# Altium PCB bop_it_pcb.PcbDoc
Units mil, origin at the board's own origin, x right, y up, seen from the top; angles counter-clockwise.
Board outline 3260 x 1550 mil, 2 copper layers (Top Layer, Bottom Layer); 18 components, 23 nets, 93 pads, 0 vias.
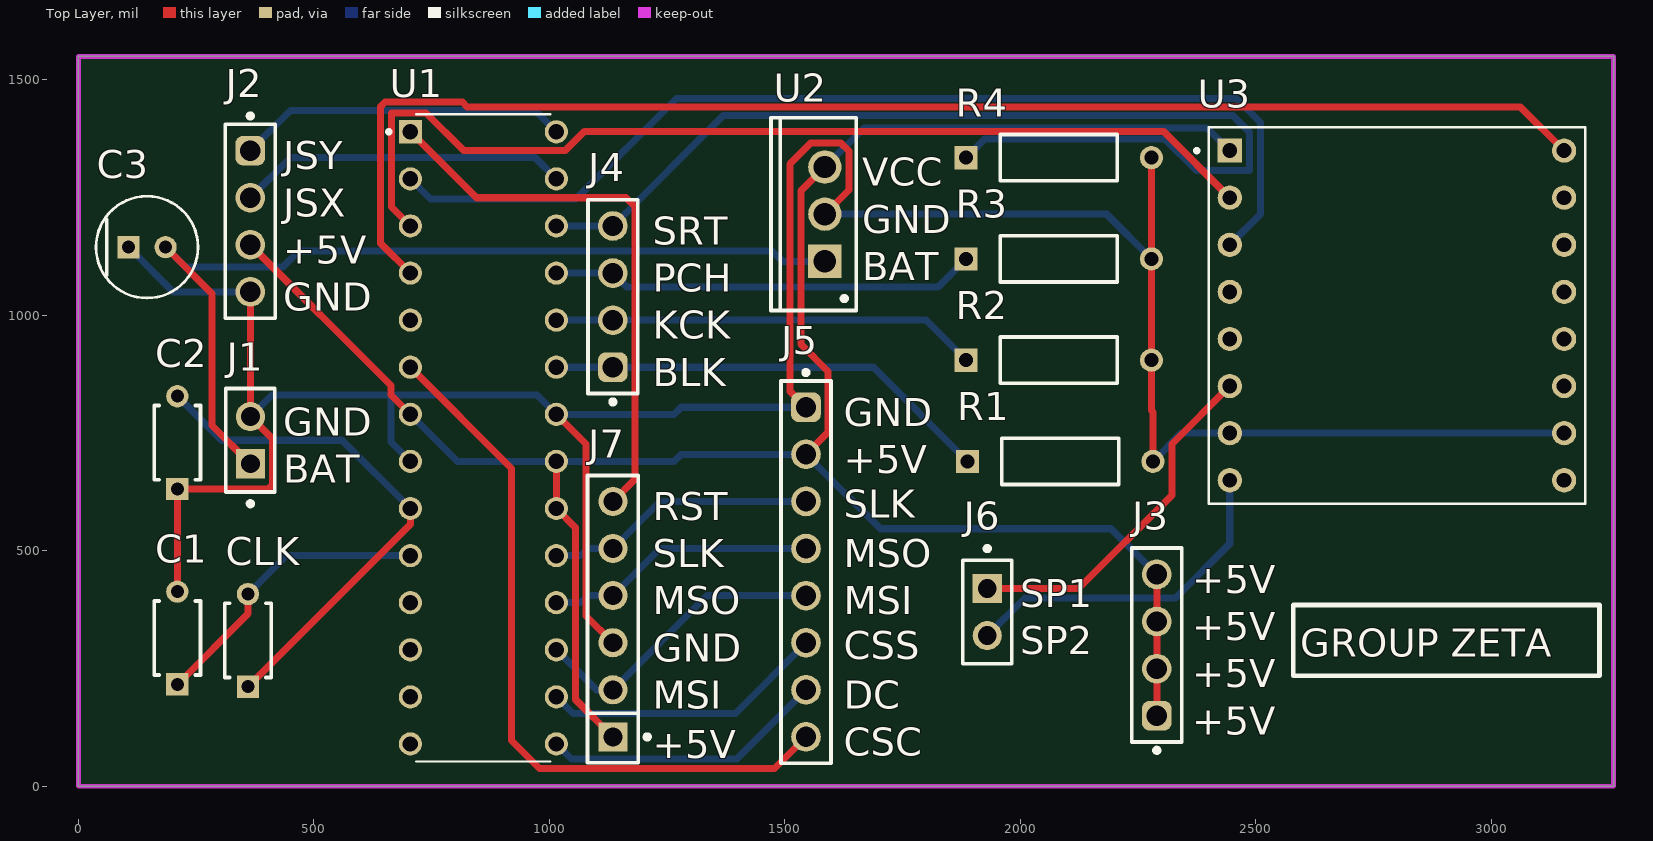
[diagram p0: Top Layer view]
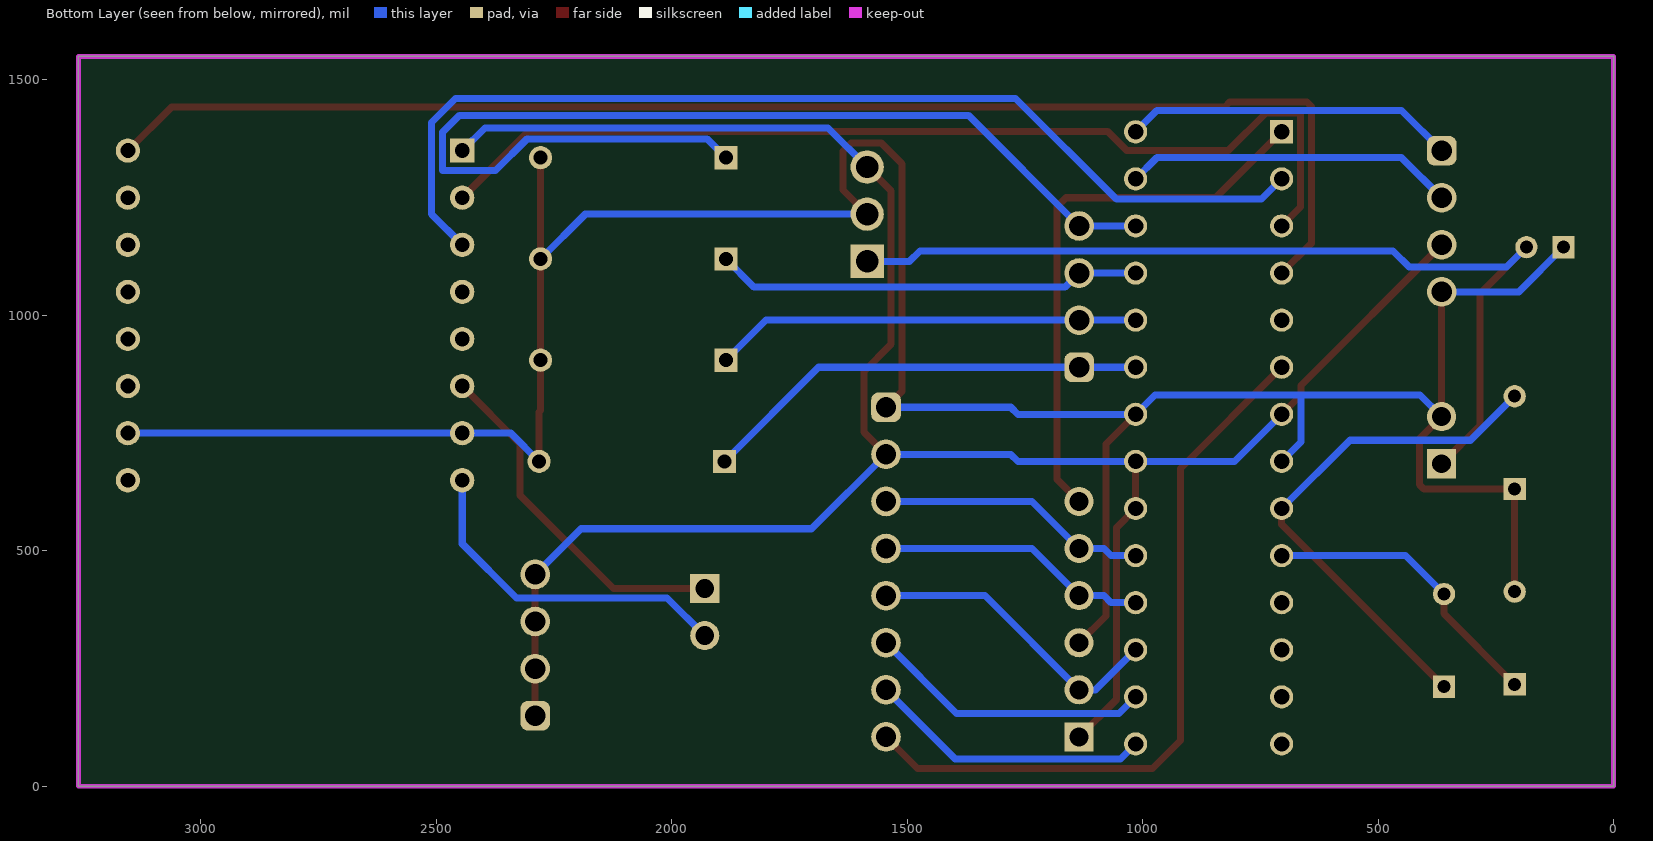
[diagram p1: Bottom Layer view, seen from below]
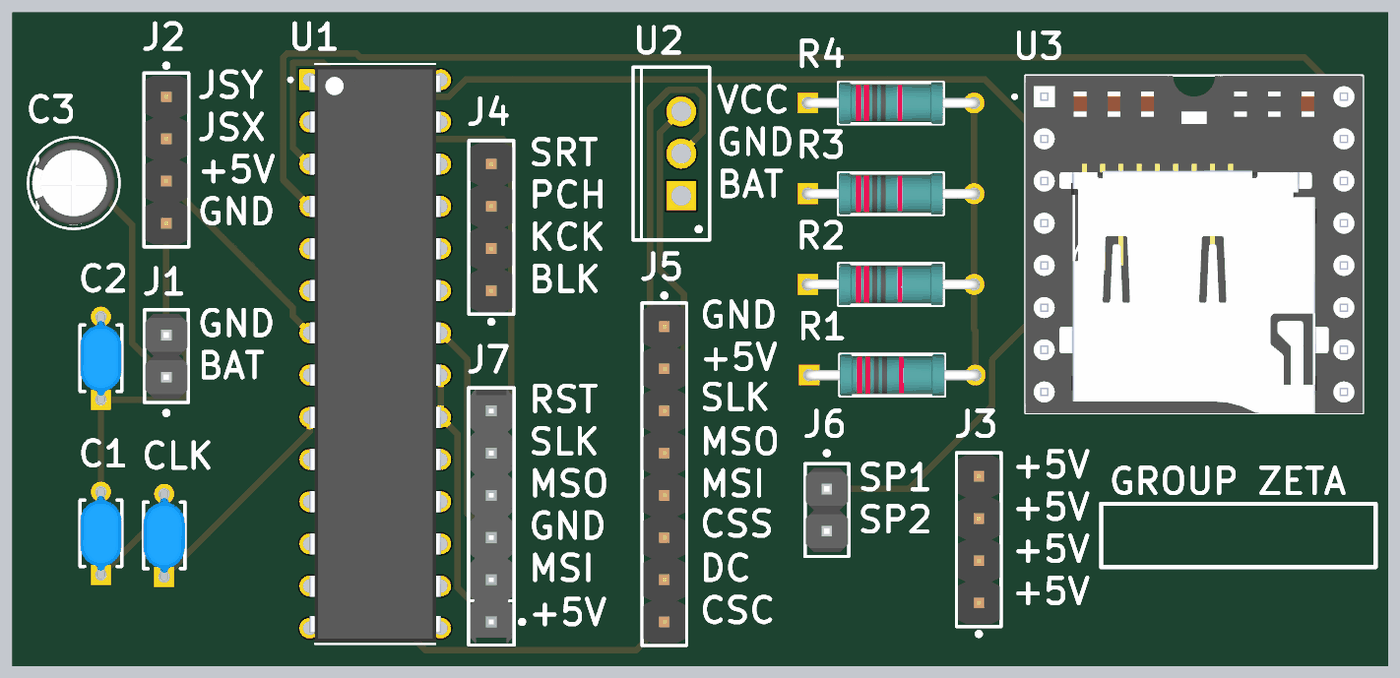
[diagram p2: 3D render of the assembled board from above, using the file's embedded part models]

## Layer stack, top to bottom
Top Solder: solder mask 0.4, Solder Resist, Dk 3.5
Top Layer: signal copper 1.4
Dielectric 1: dielectric 12.6, FR-4, Dk 4.8
Bottom Layer: signal copper 1.4
Bottom Solder: solder mask 0.4, Solder Resist, Dk 3.5

## Board outline
0,0 3260,0 3260,1550 0,1550

## Design rules (kind name [scope] priority, off if disabled: settings)
BoardOutlineClearance [All] p1: gap=7.87 ignorepadtopadclearanceinfootprint=FALSE except(15.75: Arc-SplitBarrior Arc-SplitContinuation Track-SplitBarrior Track-SplitContinuation SMDPad-SplitBarrior SMDPad-SplitContinuation THPad-SplitBarrior THPad-SplitContinuation Via-SplitBarrior Via-SplitContinuation Fill-SplitBarrior Fill-SplitContinuation Poly-SplitBarrior Poly-SplitContinuation Region-SplitBarrior Region-SplitContinuation Text-SplitBarrior Text-SplitContinuation)
Clearance "Clearance Bottom Layer" [OnLayer('Bottom Layer')] p1: gap=8 ignorepadtopadclearanceinfootprint=TRUE except(10: Arc-Text Track-Text SMDPad-Text THPad-Text Via-Text Fill-Text Poly-Text Region-Text Text-Text)
Clearance "Clearance Top Layer" [OnLayer('Top Layer')] p2: gap=8 ignorepadtopadclearanceinfootprint=TRUE except(10: Arc-Text Track-Text SMDPad-Text THPad-Text Via-Text Fill-Text Poly-Text Region-Text Text-Text)
Clearance [All] p3: gap=7.87 ignorepadtopadclearanceinfootprint=FALSE except(3.5: Arc-Arc Arc-Track Arc-SMDPad Track-Track Track-SMDPad SMDPad-SMDPad; 5: Arc-Via Track-Via SMDPad-Via THPad-Via Via-Via; 10: Arc-Text Track-Text SMDPad-Text THPad-Text Via-Text Fill-Text Poly-Text Region-Text Text-Text)
HoleSize [All] p1: absolutevalues=TRUE maxlimit=248.03 minlimit=7.87 maxpercent=80.000 minpercent=20.000
MinimumAnnularRing [All] p1: minimumring=3
MinimumSolderMaskSliver [All] p1: minsoldermaskwidth=3.94
PolygonConnect PolygonConnect_1 [All] p1: thpad.connectstyle=Relief thpad.reliefconductorwidth=20 thpad.reliefentries=4 thpad.polygonreliefangle="90 Angle" thpad.airgapwidth=10 smdpad.connectstyle=Relief smdpad.reliefconductorwidth=20 smdpad.reliefentries=4 smdpad.polygonreliefangle="90 Angle" smdpad.airgapwidth=10 via.connectstyle=Direct via.reliefconductorwidth=20 via.reliefentries=4 via.polygonreliefangle="90 Angle" via.airgapwidth=10
RoutingCorners [All] p1: cornerstyle=Round minsetback=100 maxsetback=100
RoutingVias [All] p1: holewidth=19.68 width=39.37 viastyle="Through Hole" minholewidth=7.87 minwidth=17.72 maxholewidth=39.37 maxwidth=78.74
SilkToSilkClearance [All] p1: silktosilkclearance=3.94
SilkToSolderMaskClearance [IsPad] p1: minsilkscreentomaskgap=3.94 clearancetoexposedcopper=TRUE
SolderMaskExpansion [All] p1: expansion=4 istentingtop=FALSE
SupplyNets "Schematic Supply Nets" [InNet('GND')] p1: voltage=0.000
Width [All] p1: maxlimit=100 minlimit=3.5 preferedwidth=15
25 further rules are at their usual default settings.

## Components (designator, comment, footprint, x,y, rotation, side; value= is the part's Value field where it differs from the comment)
C1 "22pF" FP-RDE0M1-MFG 210,315 r90 top
C2 "22pF" FP-RDE0M1-MFG 210,730 r90 top
C3 "" FP-RAD-TH-D_5_0_5-L_11_1-MFG 145.63,1145 r0 top
CLK "" FP-RDE0M1-MFG 360,310 r90 top
J1 "Power Supply" FP-M20-9990246-MFG 365,735 r90 top
J2 "Joystick" 61300411121 365,1200 r270 top
J3 "Buttons In" 61300411121 2290,300 r90 top
J4 "Buttons Out" 61300411121 1135,1040 r90 top
J5 "Display" 61300811121 1545,455 r270 top
J6 "Speaker" FP-M20-9990246-MFG 1930,370 r270 top
J7 "Programmer" FP-22-28-4060-MFG 1135,355 r90 top
R1 "10k" FP-MBB0207-MFG 2085,690 r0 top
R2 "10k" FP-MBB0207-MFG 2081.85,905 r0 top
R3 "10k" FP-MBB0207-MFG 2081.85,1120 r0 top
R4 "10k" FP-MBB0207-MFG 2081.85,1335 r0 top
U1 "ATMEGA328-PU" DIP787W46P254L3467H508Q28 860,740 r0 top
U2 "L7805CV" TO220FP 1585,1215 r90 top
U3 "DFPlayer" MODULE_DFR0299 2800,1000 r0 top

## Footprints (in the part's own frame and the unit in brackets; to place one, negate y for a bottom-side part, rotate by r counter-clockwise, add the part's x,y. Pads: shape width x height; smd on the part's side, far side on the other; paste and mask are expansions set on the pad)
61300411121 [mm] "Pin Header, pitch 2.54 mm, THT, Vertical, single row, 4p"
  rrect50% 1.6x1.6 hole 1.1: 1(-3.81,0)
  round 1.6 hole 1.1: 2(-1.27,0) 3(1.27,0) 4(3.81,0)
  silkscreen extent -5.8,-1.34 5.23,1.34, body extent -5.08,-1.27 5.08,1.27, height 8.57
61300811121 [mm] "Pin Header, pitch 2.54 mm, THT, Vertical, single row, 8p"
  rrect50% 1.6x1.6 hole 1.1: 1(-8.89,0)
  round 1.6 hole 1.1: 2(-6.35,0) 3(-3.81,0) 4(-1.27,0) 5(1.27,0) 6(3.81,0) 7(6.35,0) 8(8.89,0)
  silkscreen extent -10.88,-1.34 10.31,1.34, body extent -10.16,-1.27 10.16,1.27, height 8.57
DIP787W46P254L3467H508Q28 [mm]
  rect 1.25x1.25 / inner round 1.25 / far side rect 1.25x1.25 hole 0.83: 1(-3.937,16.51)
  round 1.25 hole 0.83: 2(-3.937,13.97) 3(-3.937,11.43) 4(-3.937,8.89) 5(-3.937,6.35) 6(-3.937,3.81) 7(-3.937,1.27) 8(-3.937,-1.27) 9(-3.937,-3.81) 10(-3.937,-6.35) 11(-3.937,-8.89) 12(-3.937,-11.43) 13(-3.937,-13.97) 14(-3.937,-16.51) 15(3.937,-16.51) 16(3.937,-13.97) 17(3.937,-11.43) 18(3.937,-8.89) 19(3.937,-6.35) 20(3.937,-3.81) 21(3.937,-1.27) 22(3.937,1.27) 23(3.937,3.81) 24(3.937,6.35) 25(3.937,8.89) 26(3.937,11.43) 27(3.937,13.97) 28(3.937,16.51)
  silkscreen extent -5.2,-17.45 3.62,17.45, body extent -3.95,-17.34 3.95,17.34, height 4.57
FP-22-28-4060-MFG [mm]
  rect 1.57x1.57 hole 1.02 paste-2539.97 mask+0: 1(-6.35,0)
  round 1.57 hole 1.02 paste-2539.97 mask+0: 2(-3.81,0) 3(-1.27,0) 4(1.27,0) 5(3.81,0) 6(6.35,0)
  silkscreen extent -7.75,-1.97 7.75,1.37, body extent -7.85,-1.47 7.85,1.47, height 0.25
FP-M20-9990246-MFG [mm]
  rect 1.57x1.57 hole 1.02 paste-2539.97 mask+0: 1(-1.27,0)
  round 1.57 hole 1.02 paste-2539.97 mask+0: 2(1.27,0)
  silkscreen extent -3.55,-1.32 2.79,1.32, body extent -2.89,-1.42 2.89,1.42, height 0.25
FP-MBB0207-MFG [mm]
  rect 1.25x1.25 hole 0.75 paste-2539.97 mask+0: 1(-5,0)
  round 1.25 hole 0.75 paste-2539.97 mask+0: 2(5,0)
  silkscreen extent -3.15,-1.25 3.15,1.25, body extent -5.72,-1.35 5.72,1.35, height 0.25
FP-RAD-TH-D_5_0_5-L_11_1-MFG [mm]
  rect 1.2x1.2 hole 0.7 paste-2539.97 mask+0: 1(-1,0)
  round 1.2 hole 0.7 paste-2539.97 mask+0: 2(1,0)
  silkscreen extent -2.75,-2.75 2.75,2.75, body extent -2.85,-2.85 2.85,2.85, height 0.25
FP-RDE0M1-MFG [mm]
  rect 1.2x1.2 hole 0.7 paste-2539.97 mask+0: 1(-2.5,0)
  round 1.2 hole 0.7 paste-2539.97 mask+0: 2(2.5,0)
  silkscreen extent -2,-1.25 2,1.25, body extent -3.2,-1.35 3.2,1.35, height 0.25
MODULE_DFR0299 [mil]
  rect 51.5x51.5 / inner round 51.5 / far side rect 51.5x51.5 hole 31.5: 1(-355,350)
  round 51.5 hole 31.5: 2(-355,250) 3(-355,150) 4(-355,50) 5(-355,-50) 6(-355,-150) 7(-355,-250) 8(-355,-350) 9(355,-350) 10(355,-250) 11(355,-150) 12(355,-50) 13(355,50) 14(355,150) 15(355,250) 16(355,350)
  silkscreen extent -429,-400 400,400, body extent -400,-400 400,400, height 246
TO220FP [mm] "TO, Thru-Hole, Vertical, Heatsink Mounted; 3 In-Line Leads; Pitch 2.54 mm"
  rect 1.8x1.8 hole 1.2: 1(-2.54,0)
  round 1.8 hole 1.2: 2(0,0) 3(2.54,0)
  silkscreen extent -5.2,-1.7 5.2,2.9, body extent -5.25,-1.75 5.25,2.95, height 20

## Part data
C1 C2 CLK: library part CMP-06035-043024-1, "Ceramic Capacitor 10nF ±10% 50V X7R Radial", Capacitance=10nF, Case/Package=Radial, Dielectric=X7R, Max Operating Temperature=125°C, Min Operating Temperature=-55°C, Package Quantity=500, Resistor Type=Ceramic, Tolerance=10%, Voltage Rating=50V, Height=3.5mm, Height - Seated (Max)=0.236inch, Lead Diameter=0.5mm, Lead Free="Lead Free", Lead Pitch=0.197inch, Lead/Base Style=Kinked, Length=0.157inch, Mount="Through Hole", Packaging=Bulk, Termination=Radial, Voltage Rating (DC)=50V, Width=0.098inch
C3: library part CMP-05427-001266-1, "Aluminum Electrolytic Capacitors (Radial Lead Type) 1uF ±20% 50V", Capacitance=1uF, Case/Package=Radial, Max Operating Temperature=105°C, Min Operating Temperature=-40°C, Package Quantity=2000, Ripple Current=8mA, Tolerance=20%, Voltage Rating=50V, Diameter=5mm, Height=11mm, Height - Seated (Max)=0.472inch, Lead Diameter=0.5mm, Lead Pitch=5mm, Length=11mm, Life (Hours)=5000Hour, Mount="Through Hole", Packaging="Tape and Reel", Radiation Hardening=No, RoHS Compliant=Yes, Series=EB, Termination=Radial, Voltage Rating (DC)=50V
J1 J6: library part CMP-15831-000009-1, "CONN HEADER VERT 2POS 2.54MM", Current Rating=3A, Manufacturer=Harwin, Manufacturer Part Number=M20-9990246, Temperature="-40°C to +105°C", Temperature Range High=+105°C, Temperature Range Low=-40°C, Automotive=No, Category=Conn, ComponentLink2Description=Datasheet, ComponentLink2URL=https://cdn.harwin.com/pdfs/M20-999.pdf, Conn Gender=Male, Conn Orientation=Vertical, Contact Material=Tin,Nickel, Device Class L1=Connectors, Device Class L2="Headers and Wire Housings", Device Class L3=unset, Digikey Description="CONN HEADER VERT 2POS 2.54MM", Height=8.99mm, Lead Free=Yes, Mouser Description="2.54mm (0.1\") Pitch SIL Vertical PC Tail Pin Header, 6.1mm mating pin height, tin, 2 contacts", Number Of Contacts=2, Number Of Rows=1, Octopart=https://octopart.com/m20-9990246-harwin-2590635, Package=M20-9990246, Pitch=2.54mm, RoHS=TRUE
J2 J3 J4: library part CMP-1502-01064-3, Color=Black, Contact Resistance=20mΩ, Current Rating=3A, Max Operating Temperature=105°C, Min Operating Temperature=-40°C, Operating Supply Voltage=250V, Connector Type="Male Pin", Contact Material=Copper, Contact Mating Length=5.9944mm, Contact Plating=Gold, Gender=Male, Height=8.89mm, Lead Free="Lead Free", Lead Pitch=2.54mm, Mount="Through Hole", NexarPartId=32855522, Number Of Contacts=4, Number of Pins=4, Number of Positions=4, Number Of Rows=1, Orientation=Vertical, Packaging=Bulk, Pitch=2.54mm, REACH SVHC=Unknown, RoHS=Compliant, Termination=Solder, Voltage Rating=250V
J5: library part CMP-1502-01076-3, Color=Black, Contact Resistance=20mΩ, Current Rating=3A, Max Operating Temperature=105°C, Min Operating Temperature=-40°C, Operating Supply Voltage=250V, Connector Type="Male Pin", Contact Material=Copper, Contact Mating Length=5.9944mm, Contact Plating=Gold, Gender=Male, Height=8.54mm, Lead Pitch=2.54mm, Mount="Through Hole", NexarPartId=32855533, Number Of Contacts=8, Number of Pins=8, Number of Positions=8, Number Of Rows=1, Orientation=Vertical, Packaging=Bulk, Pitch=2.54mm, REACH SVHC=Unknown, RoHS=Compliant, Termination=Solder, Voltage Rating=250V
J7: library part CMP-04776-000763-1, "CONN HEADER VERT 6POS 2.54MM", Color=Black, Contact Resistance=20mR, Current Rating=4A, Max Operating Temperature=75°C, Max Voltage Rating (AC)=250V, Max Voltage Rating (DC)=250.25kV, Min Operating Temperature=0°C, Package Quantity=1, Connector Type="Male Pin", Contact Material=Brass, Contact Mating Length=0.24inch, Contact Plating=Tin, Contact Type="Male Pin", Depth=2.49mm, Gender=Male, Housing Color=Black, Housing Material=Thermoplastic, Length=15.24mm, Mount="Through Hole", Number Of Contacts=6, Number of Positions=6, Number Of Rows=1, Orientation=Straight, Packaging=Bulk, Pitch=2.54mm, RoHS Compliant=Yes, Series="KK® 42375", Termination=Solder, Voltage Rating=250V
R1 R2 R3 R4: library part CMP-02408-000035-1, "RES 10K OHM 0.6W 1% AXIAL", Case/Package=Conformal, Max Operating Temperature=155°C, Max Power Dissipation=600mW, Min Operating Temperature=-55°C, Resistance=10kR, Resistance Tolerance=1%, Resistor Type="Metal Film", Temperature Coefficient=50ppm/°C, Voltage Rating=300V, Construction=Cylindrical, Contact Plating=Tin, Diameter=2.5mm, Features="Automotive AEC-Q200", Lead Free="Lead Free", Length=6.5mm, Military Standard=Not, Number of Terminations=2, Packaging="Tape and Reel", Power Rating=600mW, Radiation Hardening=No, RoHS Compliant=Yes, Series="MBB 0207 - Professional", Technology="THIN FILM", Termination=Axial, Tolerance=1%, Voltage Rating (DC)=300V
U1: "AVR AVRÂ® ATmega Microcontroller IC 8-Bit 20MHz 32KB (16K x 16) FLASH 28-PDIP", Package="DIP-28 Microchip Technology", Availability="In Stock", Check_prices=https://www.snapeda.com/parts/ATMEGA328-PU/Microchip/view-part/?ref=eda, MF=Microchip, MP=ATMEGA328-PU, Price=None, Purchase-URL=https://pricing.snapeda.com/search/part/ATMEGA328-PU/?ref=eda, SnapEDA_Link=https://www.snapeda.com/parts/ATMEGA328-PU/Microchip/view-part/?ref=snap
U2: library part CMP-0244-00479-1, "Positive Voltage Regulator, 5V, 3-Pin TO-220FP", ComponentLink1Description="Manufacturer URL", ComponentLink1URL=http://www.st.com, ComponentLink2Description=Datasheet, ComponentLink2URL=http://www.st.com/internet/com/TECHNICAL_RESOURCES/TECHNICAL_LITERATURE/DATASHEET/CD00000444.pdf, DatasheetVersion=16/11/2011, PackageDescription="TO, Thru-Hole, Vertical, Heatsink Mounted; 3 In-Line Leads; Pitch 2.54 mm", PackageReference=TO220FP, PackageVersion=2011
U3: library part DFR0299, "- MP3 Player Audio Arduino Platform Evaluation Expansion Board", Package=None, Check_prices=https://www.snapeda.com/parts/DFR0299/DFRobot/view-part/?ref=eda, MF=DFRobot, MP=DFR0299, SnapEDA_Link=https://www.snapeda.com/parts/DFR0299/DFRobot/view-part/?ref=snap

## Nets (pads, with @x,y where several pads share a name; then routed paths per layer and width w, separated by ;. In a path a pad name is that pad's centre, name@x,y a point inside that pad or via, vN(x,y) a via of type N, cw(c..) or ccw(c..) an arc to the next point about the centre after c; other vN are vias at no path point)
Block: J4.1 R1.1 U1.23 | length 956
  Bottom Layer w15: U1.23 J4.1 1688.15,890 R1.1
BUSY: U1.4 U3.16 | length 2939.7
  Top Layer w15: U1.4 641.89,1153.11 641.89,1444 651,1453.11 815.22,1453.11 825.32,1443 3062,1443 U3.16
"Chip Select Screen": J5.6 U1.16 | length 606.6
  Bottom Layer w15: U1.16 1050,155 1395,155 J5.6
"Chip Select SD Card": J5.8 U1.6 | length 1559.2
  Top Layer w15: U1.6 920,675 920,97 979,38 1478,38 J5.8
"Data Command": J5.7 U1.15 | length 604.1
  Bottom Layer w15: U1.15 1047,58 1398,58 J5.7
GND: C1.2 C2.1 C3.1 J1.2 J2.4 J5.1 J7.3 R1.2 R2.2 R3.2 R4.2 U1.8 U1.22 U2.2 U3.7 U3.10 | length 6179.6
  Top Layer w15: C1.2 C2.1 403,631.57 412,640.57 412,738 J1.2 J2.4 ; U1.22 1078.11,726.89 1078.11,361.89 J7.3 ; J5.1 1511,839 1511,1322 1555,1366 1619,1366 1636,1349 1636,1266 U2.2 ; R4.2 R3.2 R2.2 2278.7,798.15 2281.85,795 R1.2
  Bottom Layer w15: C3.1 201.26,1050 J2.4 ; J1.2 411,831 664,831 ; U1.8 664,731 664,831 ; J5.1 1280,805 1265,790 U1.22 974,831 664,831 ; U2.2 2183.7,1215 R3.2 ; R1.2 2341.85,750 U3.7 U3.10
"Joystick X": J2.2 U1.27 | length 703.8
  Bottom Layer w15: J2.2 450,1335 970,1335 U1.27
"Joystick Y": J2.1 U1.28 | length 703.8
  Bottom Layer w15: J2.1 450,1435 970,1435 U1.28
Kick: J4.2 R2.1 U1.24 | length 905.2
  Bottom Layer w15: U1.24 J4.2 1800,990 R2.1
MISO: J5.4 J7.4 U1.18 | length 577.6
  Bottom Layer w15: U1.18 1067,390 1082,405 J7.4 1235,505 J5.4
MOSI: J5.5 J7.2 U1.17 | length 648.1
  Bottom Layer w15: U1.17 1100,205 J7.2 1335,405 J5.5
NetC1_1: C1.1 CLK.2 U1.10 | length 632.8
  Top Layer w15: C1.1 360,366.57 CLK.2
  Bottom Layer w15: CLK.2 441.57,490 U1.10
NetC2_2: C2.2 CLK.1 U1.9 | length 1115.1
  Top Layer w15: CLK.1 705,556.57 U1.9
  Bottom Layer w15: C2.2 303.43,735 560,735 U1.9
NetC3_2: C3.2 J1.1 U2.1 | length 1975.2
  Top Layer w15: C3.2 284,1046 284,766 J1.1
  Bottom Layer w15: C3.2 227,1103 434,1103 468,1137 1473,1137 1495,1115 U2.1
Punch: J4.3 R3.1 U1.25 | length 907.3
  Bottom Layer w15: U1.25 J4.3 1165,1060 1825,1060 R3.1
Reset: J7.6 U1.1 | length 1188.3
  Top Layer w15: U1.1 845.11,1249.89 1163.11,1249.89 1182,1231 1182,652 J7.6
RXD: U1.2 U3.3 | length 2219.5
  Bottom Layer w15: U1.2 748,1247 1056,1247 1270,1461 2459,1461 2510,1410 2510,1215 U3.3
SCLK: J5.3 J7.5 U1.19 | length 577.6
  Bottom Layer w15: U1.19 1067,490 1082,505 J7.5 1235,605 J5.3
SPK1: J6.1 U3.6 | length 757
  Top Layer w15: J6.1 2124,420 2322,618 2322,727 U3.6
SPK2: J6.2 U3.8 | length 730.8
  Bottom Layer w15: J6.2 2010,400 2330,400 2445,515 U3.8
Start: J4.4 R4.1 U1.26 | length 2311.7
  Bottom Layer w15: U1.26 J4.4 1370,1425 2451,1425 2487,1389 2487,1308 2374.11,1308 2307,1375.11 1925.11,1375.11 R4.1
TXD: U1.3 U3.2 | length 2145.5
  Top Layer w15: U1.3 664.89,1230.11 664.89,1430.11 737.89,1430.11 818.11,1349.89 1033.89,1349.89 1075,1391 2304,1391 U3.2
Vcc: J2.3 J3.1 J3.2 J3.3 J3.4 J5.2 J7.1 U1.7 U1.20 U1.21 U2.3 U3.1 | length 4762.8
  Top Layer w15: J2.3 664,851 664,831 U1.7 ; U1.21 U1.20 1055.11,549.89 1055.11,184.89 J7.1 ; J5.2 1592,752 1592,881 1534,939 1534,1264 U2.3 ; J3.1 J3.2 J3.3 J3.4
  Bottom Layer w15: U1.7 805,690 U1.21 1265,690 1280,705 J5.2 1703,547 2193,547 J3.4 ; U2.3 1668.11,1398.11 2396.89,1398.11 U3.1
pads on no net: U1.5 U1.11 U1.12 U1.13 U1.14 U3.4 U3.5 U3.9 U3.11 U3.12 U3.13 U3.14 U3.15

## Keep-outs
Keep-Out Layer:
  the board outline again, w10

## Silkscreen, mask and mechanical layers (free items; w line width, h text height)
Top Overlay:
  lines w10: 2580,235 3230,235 3230,385 2580,385 2580,235
  text "JSY" at 435,1310 h60
  text "VCC" at 1665,1275 h60
  text "JSX" at 435,1210 h60
  text "GND" at 1665,1175 h60
  text "SRT" at 1220,1150 h60
  text "+5V" at 435,1110 h60
  text "BAT" at 1665,1075 h60
  text "PCH" at 1220,1050 h60
  text "GND" at 435,1010 h60
  text "KCK" at 1220,950 h60
  text "BLK" at 1220,850 h60
  text "GND" at 1625,765 h60
  text "GND" at 435,745 h60
  text "+5V" at 1625,665 h60
  text "BAT" at 435,645 h60
  text "SLK" at 1625,570 h60
  text "RST" at 1220,565 h60
  text "SLK" at 1220,465 h60
  text "MSO" at 1625,465 h60
  text "+5V" at 2365,410 h60
  text "SP1" at 2000,380 h60
  text "MSO" at 1220,365 h60
  text "MSI" at 1625,365 h60
  text "+5V" at 2365,310 h60
  text "SP2" at 2000,280 h60
  text "GROUP ZETA" at 2595,275 h60
  text "CSS" at 1625,270 h60
  text "GND" at 1220,265 h60
  text "+5V" at 2365,210 h60
  text "MSI" at 1220,165 h60
  text "DC" at 1625,165 h60
  text "+5V" at 2365,110 h60
  text "CSC" at 1625,65 h60
  text "+5V" at 1220,60 h60